# EAGLE board MAX30003 (EAGLE 9.6.2)
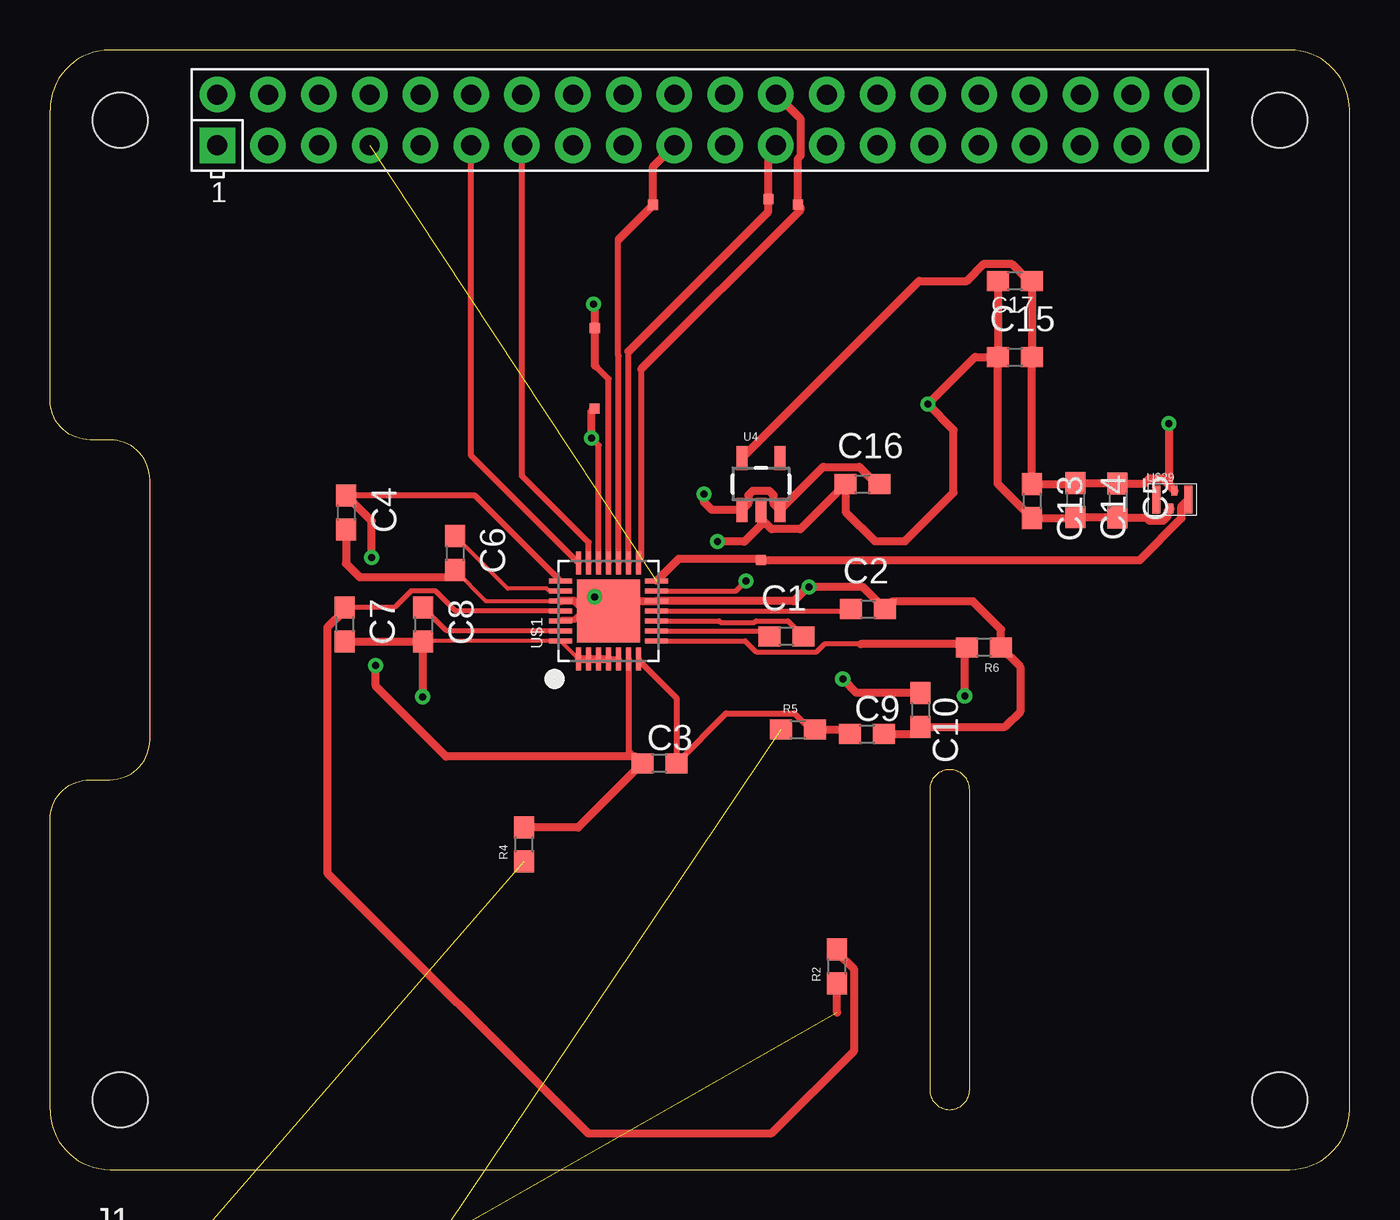
[diagram p0: board, top side]
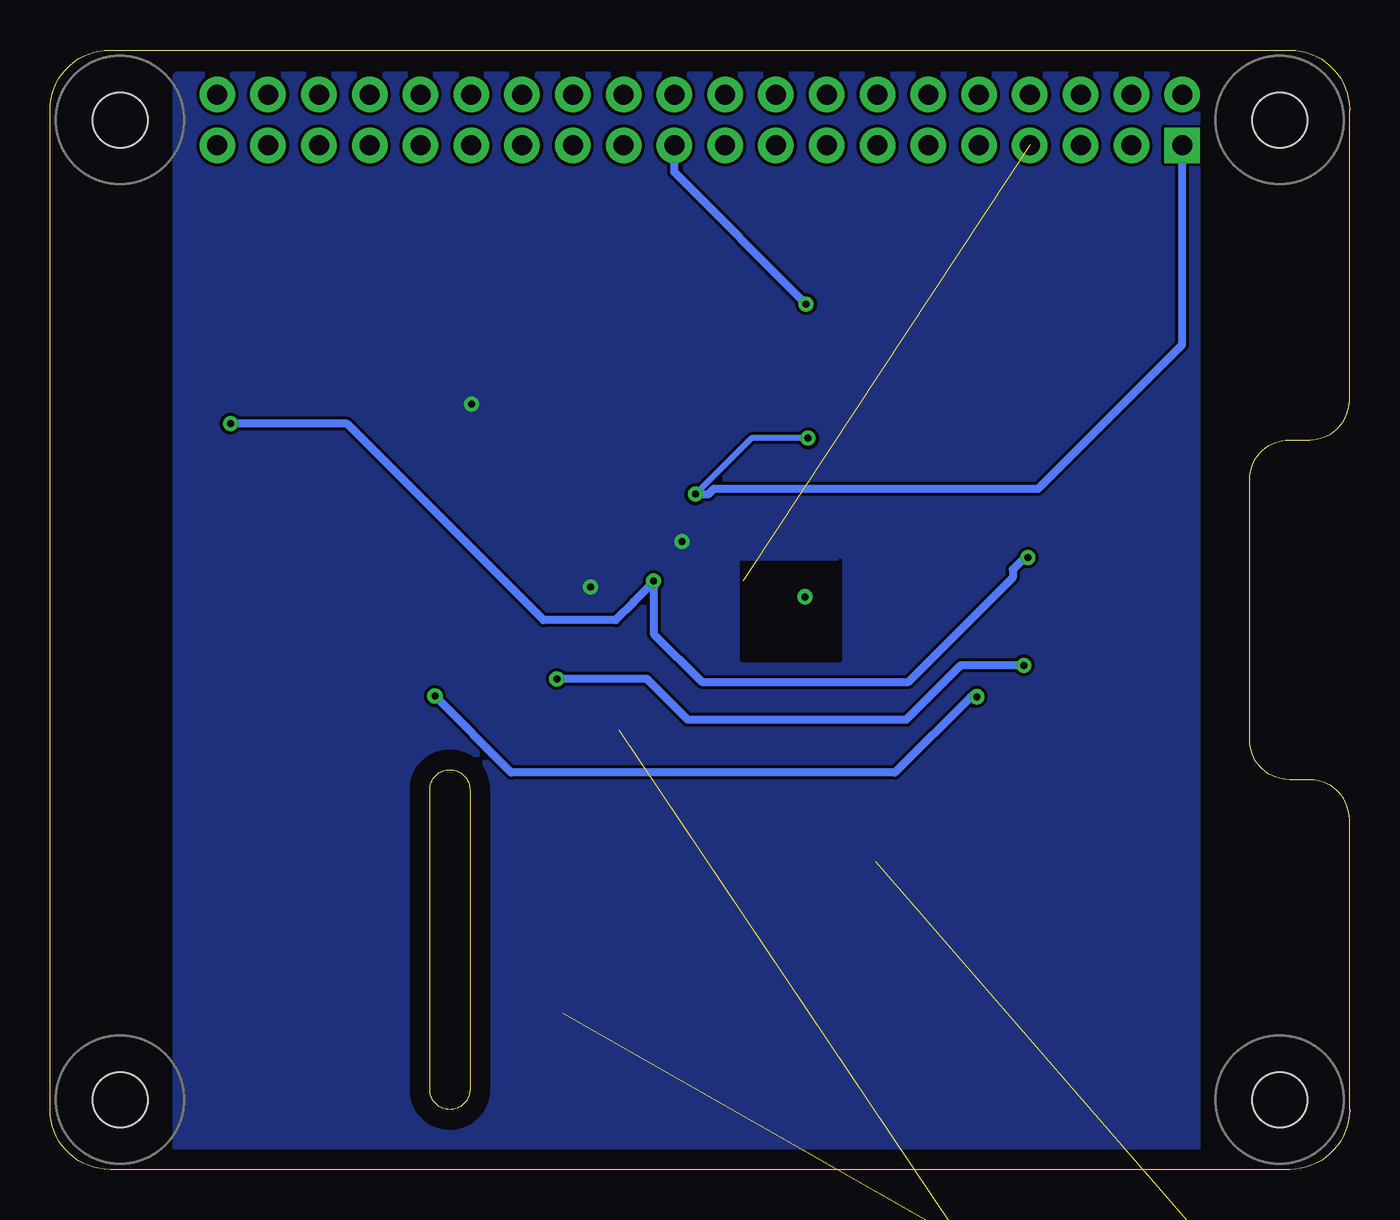
[diagram p1: board, bottom side, seen from below]

Size 65 x 56 mm. Coordinates in mm from the lower left corner, seen from the top.
Copper layers (1*16): Top 0.035mm / dielectric 1.5mm / Bottom 0.035mm
Design rules "default": minimum track width 6mil, minimum drill 0.35mm, track to track 6mil, track to pad 6mil, pad to pad 6mil, via to via 6mil, smd to smd 6mil, copper to edge 40mil, drill to drill 6mil, minimum pad ring 10mil, minimum via ring 8mil, stop-mask expansion 4mil, vias tented up to drill 0mil, thermal gap 10mil

## Footprints (pad centres in the part's own frame; a part is rotated, then mirrored left to right if it is on the bottom)
0603 = smd 1.1 x 1: 1 -0.85,0; 2 0.85,0
CUI_SJ-3523-SMT-TR = smd 2.2 x 2.8: 1 -1.1,-3.7; 3 0.9,3.7 | smd 2.8 x 2.8: 2 8.3,-3.7 | hole 1.7: 0,0; 7,0
PAD.02X.02 = smd 0.508 x 0.508: P$1 0,0
SOT23-5 = smd 0.55 x 1.2: 1 -0.95,-1.3; 2 0,-1.3; 3 0.95,-1.3; 4 0.95,1.3; 5 -0.95,1.3
QFN-28 = smd 1.15 x 0.27: 1 -2.4,1.5; 2 -2.4,1; 3 -2.4,0.5; 4 -2.4,0; 5 -2.4,-0.5; 6 -2.4,-1; 7 -2.4,-1.5; 15 2.4,-1.5; 16 2.4,-1; 17 2.4,-0.5; 18 2.4,0; 19 2.4,0.5; 20 2.4,1; 21 2.4,1.5 | smd 0.27 x 1.15: 8 -1.5,-2.4; 9 -1,-2.4; 10 -0.5,-2.4; 11 0,-2.4; 12 0.5,-2.4; 13 1,-2.4; 14 1.5,-2.4; 22 1.5,2.4; 23 1,2.4; 24 0.5,2.4; 25 0,2.4; 26 -0.5,2.4; 27 -1,2.4; 28 -1.5,2.4 | smd 3.15 x 3.15: THERMAL 0,0
SIT1533 = smd 0.4 x 1.4: 1 -0.8,0; 3 0.8,0 | smd 0.3 x 0.5: 2 -0.1,-0.45; 4 0.1,0.45
RASPI_BOARD_B+HAT_DF_CF = drill 1 pad 1.778 square: 1 8.37,51.23 | drill 1 pad 1.778: 2 8.37,53.77; 3 10.91,51.23; 4 10.91,53.77; 5 13.45,51.23; 6 13.45,53.77; 7 15.99,51.23; 8 15.99,53.77; 9 18.53,51.23; 10 18.53,53.77; 11 21.07,51.23; 12 21.07,53.77; 13 23.61,51.23; 14 23.61,53.77; 15 26.15,51.23; 16 26.15,53.77; 17 28.69,51.23; 18 28.69,53.77; 19 31.23,51.23; 20 31.23,53.77; 21 33.77,51.23; 22 33.77,53.77; 23 36.31,51.23; 24 36.31,53.77; 25 38.85,51.23; 26 38.85,53.77; 27 41.39,51.23; 28 41.39,53.77; 29 43.93,51.23; 30 43.93,53.77; 31 46.47,51.23; 32 46.47,53.77; 33 49.01,51.23; 34 49.01,53.77; 35 51.55,51.23; 36 51.55,53.77; 37 54.09,51.23; 38 54.09,53.77; 39 56.63,51.23; 40 56.63,53.77 | hole 2.75: 3.5,3.5; 3.5,52.5; 61.5,3.5; 61.5,52.5

## Placement (x,y rotation side)
C1  1.0uF  [0603]  36.83,26.67 0 top
C2  1nF  [0603]  40.92,28.03 0 top
C3  1nF  [0603]  30.48,20.32 0 top
C4  10uF  [0603]  14.81,32.86 270 top
C5  1.0uF  [0603]  53.4,33.46 270 top
C6  10uF  [0603]  20.25,30.83 270 top
C7  10uF  [0603]  14.73,27.27 270 top
C8  1.0uF  [0603]  18.67,27.26 270 top
C9  1nF  [0603]  40.86,21.78 0 top
C10  1nF  [0603]  43.53,22.99 270 top
C13  1.0uF  [0603]  49.11,33.44 270 top
C14  10uF  [0603]  51.28,33.49 270 top
C15  1.0uF  [0603]  48.26,40.64 0 top
C16  1.0uF  [0603]  40.64,34.29 0 top
C17  1.0uF  [0603]  48.26,44.45 180 top
J1  SJ-3523-SMT-TR  [CUI_SJ-3523-SMT-TR]  5.26,-8.5 0 top  (outside the outline)
R2  0.05  [0603]  39.37,10.16 90 top
R4  47k  [0603]  23.72,16.26 90 top
R5  47k  [0603]  37.41,22.01 0 top
R6  0.05  [0603]  46.72,26.12 180 top
TP1  TEST-POINT2  [PAD.02X.02]  30.17,48.25 0 top
TP2  TEST-POINT2  [PAD.02X.02]  27.25,42.08 0 top
TP3  TEST-POINT2  [PAD.02X.02]  37.42,48.27 0 top
TP5  TEST-POINT2  [PAD.02X.02]  35.56,30.48 0 top
TP6  TEST-POINT2  [PAD.02X.02]  27.24,38.07 0 top
TP8  TEST-POINT2  [PAD.02X.02]  35.93,48.54 0 top
U4  AP2112K-1.8V  [SOT23-5]  35.56,34.29 0 top
U$1  MAX30003CTI+  [QFN-28]  27.94,27.94 90 top
U$29  SIT1533  [SIT1533]  56.14,33.51 0 top
X1  RASPI_BOARD_B+_HDC  [RASPI_BOARD_B+HAT_DF_CF]  0,0 0 top

## Library data of the parts
C1 C5 C8 C13 C15-C17 = SparkFun-Capacitors; PROD_ID: CAP-00868
C2 C3 C9 C10 = SparkFun-Capacitors; PROD_ID: CAP-07886
C4 C6 C7 C14 = SparkFun-Capacitors; PROD_ID: CAP-11015
J1 = SJ-3523-SMT-TR; AVAILABILITY: In Stock; CUI_PURCHASE_URL: https://www.cuidevices.com/product/interconnect/connectors/audio-connectors/jacks/sj-352x-smt-series?utm_source=snapeda.com&utm_medium=referral&utm_campaign=snapedaBOM; DESCRIPTION: 3.5 mm, Stereo, Right Angle, Surface Mount (SMT), 3 Conductors, 0~1 Internal Switches, Audio Jack Connector; MF: CUI Devices; MP: SJ-3523-SMT-TR; PACKAGE: None; PRICE: None; PURCHASE-URL: https://pricing.snapeda.com/search/part/SJ-3523-SMT-TR/?ref=eda
R2 R6 = SparkFun-Resistors; PROD_ID: RES-12535
R4 R5 = SparkFun-Resistors; PROD_ID: RES-07871
TP1-TP3 TP5 TP6 TP8 = SparkFun-Connectors@1
U4 = SparkFun-PowerIC; PROD_ID: VREG-12457
U$1 U$29 = circuitects
X1 = raspberrypi_bastelstube_v13

## Nets
5V0: X1.2
+1.8V: C4.1 C5.1 C13.1 C14.1 C15.2 C17.1 U4.5 U$1.13 U$1.22 U$29.4
AGND: C7.2 C8.2 R6.2 U$1.1 U$1.2 U$1.3 U$1.4 U$1.5 U$1.8 U$1.28
CSB: TP3.P$1 U$1.15 X1.24
ECGN: C3.2 C9.1 R5.2 U$1.7
ECGP: C3.1 C10.1 R4.2 U$1.6
FCLK: TP5.P$1 U$1.14 U$29.3 X1.7
GND: C2.2 C4.2 C5.2 C6.2 C9.2 C10.2 C13.2 C14.2 C15.1 C16.1 C17.2 R6.1 U4.2 U$1.12 U$1.24 U$1.26 U$1.THERMAL U$29.2
INT2B: U$1.20 X1.13
INTB: U$1.21 X1.11
MISO: TP2.P$1 U$1.18 X1.21
MOSI: TP1.P$1 U$1.17 X1.19
N$1: J1.3 R4.1
N$2: C6.1 U$1.23
N$3: C1.1 U$1.9
N$4: J1.1 R2.1
N$5: X1.6
N$6: C1.2 U$1.10
N$7: C2.1 U$1.11
N$9: J1.2 R5.1
N$14: C8.1 U$1.27
SCLK: TP8.P$1 U$1.16 X1.23
VCM: C7.1 R2.2 U$1.25
VDD: C16.2 TP6.P$1 U4.1 U4.3 U$1.19 X1.1

## Tracks (layer width: path | path; a pad name or v marks a point on that pad's centre or on a via)
+1.8V  (via drill 0.35)
  Top 0.254: U$1.13 34.32,28.94 v34.81,29.43
  Top 0.305: U$1.22 21.27,33.71 C4.1
  Top 0.406: v16.09,30.61 16.09,32.43 C4.1 | v55.97,37.31 55.97,34.23 U$29.4 55.9,34.3 55.9,34.36 55.69,34.57 54.99,34.57 54.74,34.31 C5.1 53.37,34.34 C14.1 51.23,34.29 C13.1 C15.2 C17.1 48.96,44.45 48.11,45.31 46.71,45.31 45.86,44.45 43.47,44.45 U4.5
  Bottom 0.406: v16.09,30.61 16.25,30.61 16.84,30.02 16.84,29.61 22.06,24.39 32.4,24.39 34.81,26.8 v34.81,29.43 34.81,29.4 35.79,28.42 35.79,28.39 36.71,27.48 40.31,27.48 50.15,37.31 v55.97,37.31
AGND  (via drill 0.35)
  Top 0.203: U$1.1 U$1.28 18.7,26.44 18.64,26.38
  Top 0.254: 18.7,26.44 C8.2 | U$1.8 34.76,26.44 35.31,25.89 38.35,25.89 38.73,26.28 40.56,26.28
  Top 0.305: U$1.4 U$1.5
  Top 0.406: C7.2 C8.2 18.64,26.38 v18.64,23.65 | U$1.1 U$1.2 U$1.3 U$1.4 | 40.56,26.28 45.71,26.28 R6.2 45.75,26 v45.75,23.68
  Bottom 0.406: v18.64,23.65 18.95,23.65 22.74,19.86 41.93,19.86 v45.75,23.68
CSB
  Top 0.203: 29.44,30.51 U$1.15
  Top 0.305: 29.56,40.03 29.56,30.64 29.44,30.51
  Top 0.406: 29.56,40.03 37.53,48 37.53,48.16 TP3.P$1 37.42,50.58 37.55,50.71 37.55,52.52 X1.24
ECGN
  Top 0.305: U$1.7 29.44,25.49 31.33,23.6 C3.2 33.82,22.82 37.24,22.82 38.04,22.01 R5.2
  Top 0.406: R5.2 39.78,22.01 C9.1
ECGP  (via drill 0.35)
  Top 0.203: U$1.6 28.94,21.01 C3.1
  Top 0.305: U$1.6 28.94,20.89 29.57,20.26
  Top 0.406: R4.2 26.42,17.11 29.57,20.26 C3.1 29.29,20.66 19.81,20.66 16.29,24.18 v16.29,25.22 | v39.65,24.54 40.35,23.84 C10.1
  Bottom 0.406: v16.29,25.22 19.46,25.22 22.17,22.51 33.11,22.51 35.14,24.54 v39.65,24.54
FCLK  (1 unrouted)
  Top 0.406: U$1.14 31.44,30.54 35.5,30.54 TP5.P$1 54.5,30.48 56.6,32.58 56.6,33.17 U$29.3
GND  (via drill 0.35)
  Top 0.203: C6.2 21.79,28.44 U$1.24
  Top 0.305: U$1.26 25.6,27.5 26.24,27.5 26.68,27.94 U$1.THERMAL
  Top 0.406: C17.2 C15.1 | 47.41,36.42 C15.1 | C15.1 47.41,34.29 C13.2 51.23,32.59 C14.2 53.37,32.64 C5.2 54.84,32.61 54.99,32.45 55.69,32.45 55.9,32.66 55.9,32.92 U$29.2 | C4.2 14.81,30.31 15.5,29.62 19.89,29.62 C6.2 | C15.1 46.27,40.64 v43.91,38.28 45.2,36.99 45.2,33.86 42.77,31.43 41.26,31.43 39.79,32.9 C16.1 37.53,32.03 36.09,32.03 35.56,32.56 U4.2 35.56,32.24 34.73,31.41 v33.38,31.41 | U$1.12 | U$1.12 37.21,28.43 37.91,29.13 v37.96,29.13 40.67,29.13 C2.2 42.16,28.42 46.17,28.42 47.57,27.02 R6.1 48.53,25.16 48.53,22.9 47.77,22.14 C10.2 43.17,21.78 C9.2 | U$1.24 26.26,28.43 26.75,27.94 U$1.THERMAL 28.43,28.43 U$1.12
  Bottom 0.406: v33.38,31.41 33.38,31.52
  pour Bottom: 7.66,54.73 7.66,0.73 58.66,0.73 58.66,54.73
INT2B
  Top 0.305: U$1.20 26.94,31.36 23.61,34.69 X1.13
INTB
  Top 0.305: U$1.21 21.07,35.71 X1.11
MISO  (via drill 0.35)
  Top 0.305: U$1.18 27.94,39.54 27.31,40.17
  Top 0.406: 27.31,40.17 27.25,40.23 TP2.P$1 27.25,43.22 v27.18,43.29
  Bottom 0.406: v27.18,43.29 33.77,49.88 X1.21
MOSI
  Top 0.305: U$1.17 28.44,40.69 28.42,40.71 28.42,46.5 28.44,46.52
  Top 0.406: 28.44,46.52 TP1.P$1 30.17,50.17 X1.19
N$1  (1 unrouted)
N$2
  Top 0.203: U$1.23 24.97,28.94 24.86,29.05 22.89,29.05 C6.1
N$3
  Top 0.254: U$1.9 35.71,26.94 C1.1
N$4  (1 unrouted)
  Top 0.406: 39.37,7.84 R2.1
N$6
  Top 0.254: U$1.10 33.47,27.44 33.54,27.37 35.24,27.37 35.31,27.45 36.9,27.45 C1.2
N$7
  Top 0.254: U$1.11 39.98,27.94 C2.1
N$8  (via drill 0.35)
  other vias: 27.23,28.65
N$9  (1 unrouted)
N$14
  Top 0.254: U$1.27 19.84,26.94 C8.1
SCLK
  Top 0.305: U$1.16 28.93,40.92
  Top 0.406: 28.93,40.92 35.93,47.92 TP8.P$1 35.93,50.85 X1.23
THERMALGND
  cutout Bottom: 25.47,30.49 25.47,25.46 25.46,25.45 30.41,25.45 30.41,30.39 25.52,30.39
VCM
  Top 0.254: U$1.25 20.28,27.94 19.29,28.94 18.05,28.94 17.23,28.12 C7.1
  Top 0.406: C7.1 14.73,27.97 13.87,27.12 13.87,14.84 26.9,1.81 36.1,1.81 40.23,5.94 40.23,10.01 39.37,10.86 R2.2
VDD  (via drill 0.35)
  Top 0.305: U$1.19 27.44,36.22 v27.08,36.58
  Top 0.406: v32.72,33.78 32.72,33.38 33.11,32.99 U4.1 34.93,33.31 34.93,33.74 35.14,33.95 35.98,33.95 36.19,33.74 36.19,33.31 U4.3 38.67,35.15 40.49,35.15 41.34,34.29 C16.2 | v27.08,36.58 27.08,37.91 TP6.P$1
  Bottom 0.305: v27.08,36.58 29.92,36.58 v32.72,33.78
  Bottom 0.406: v32.72,33.78 32.07,33.78 31.79,34.06 15.57,34.06 8.37,41.26 X1.1